# Altium PCB Multimeter_Schematic.PcbDoc
Units mm, origin at the board's own origin, x right, y up, seen from the top; angles counter-clockwise.
Board outline 120 x 80 mm, 2 copper layers (Top Layer, Bottom Layer); 89 components, 62 nets, 306 pads, 51 vias.
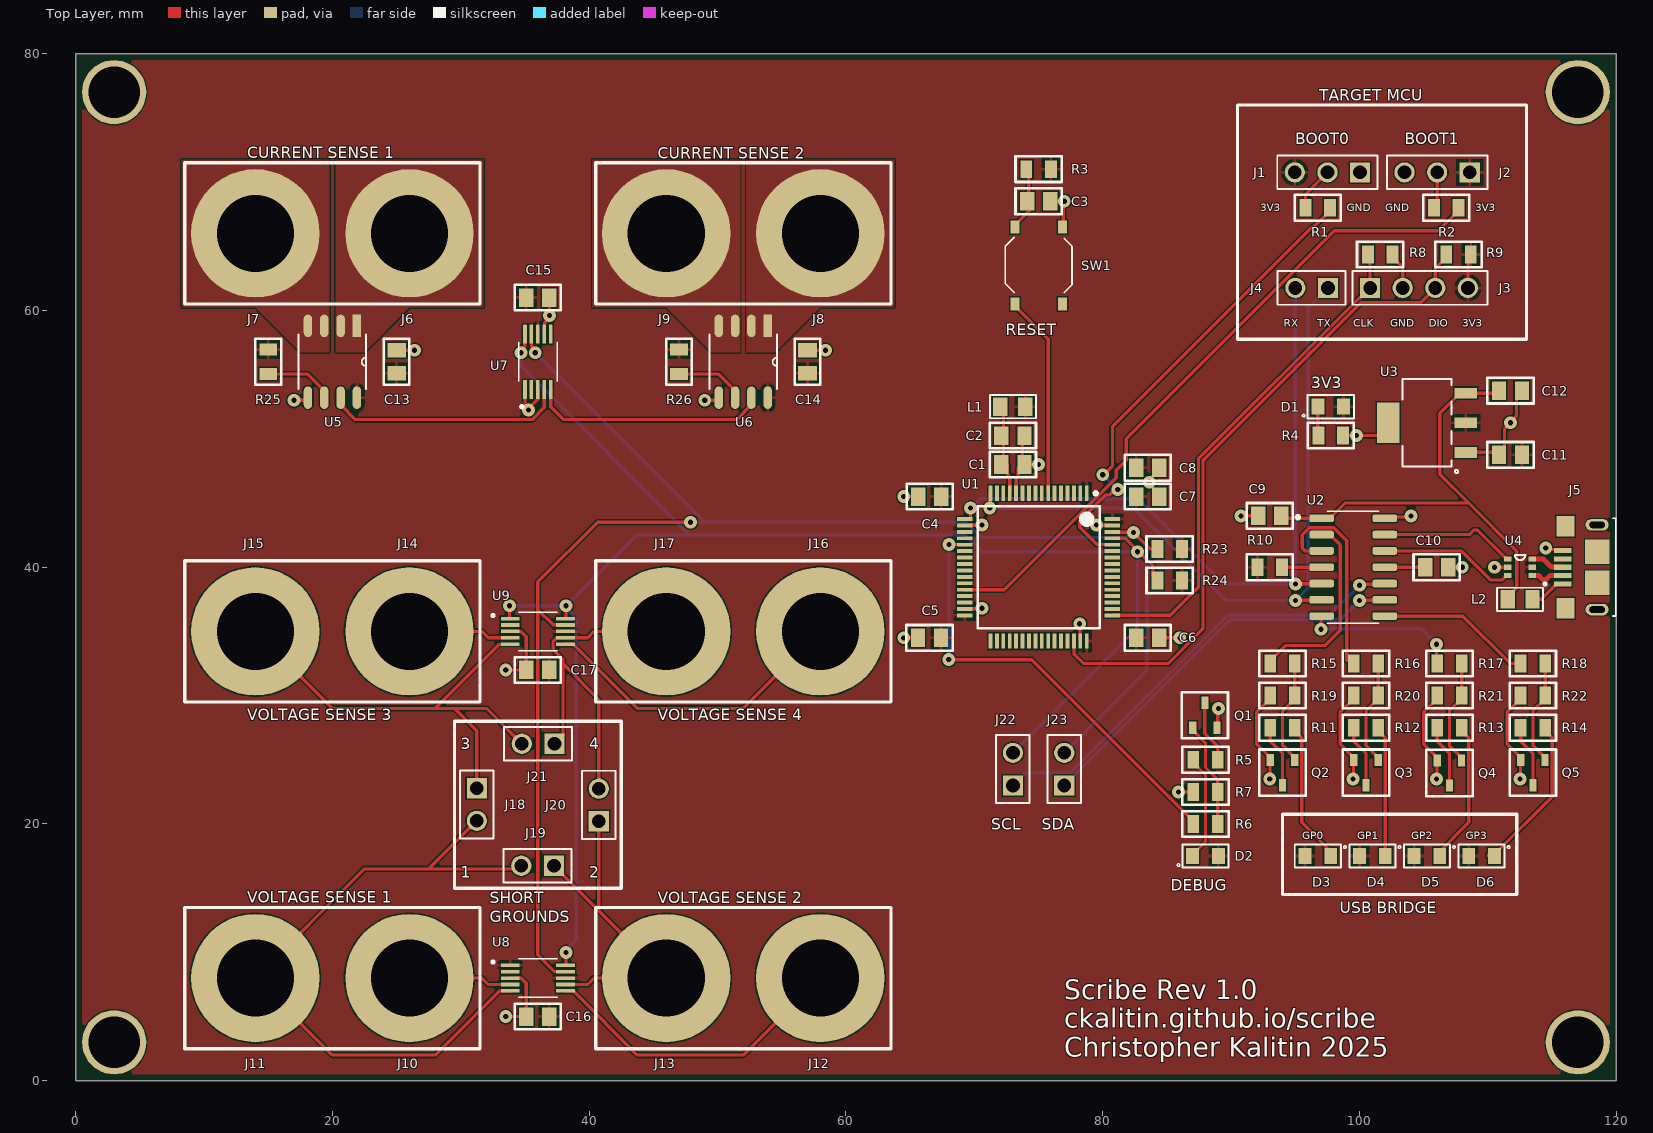
[diagram p0: Top Layer view]
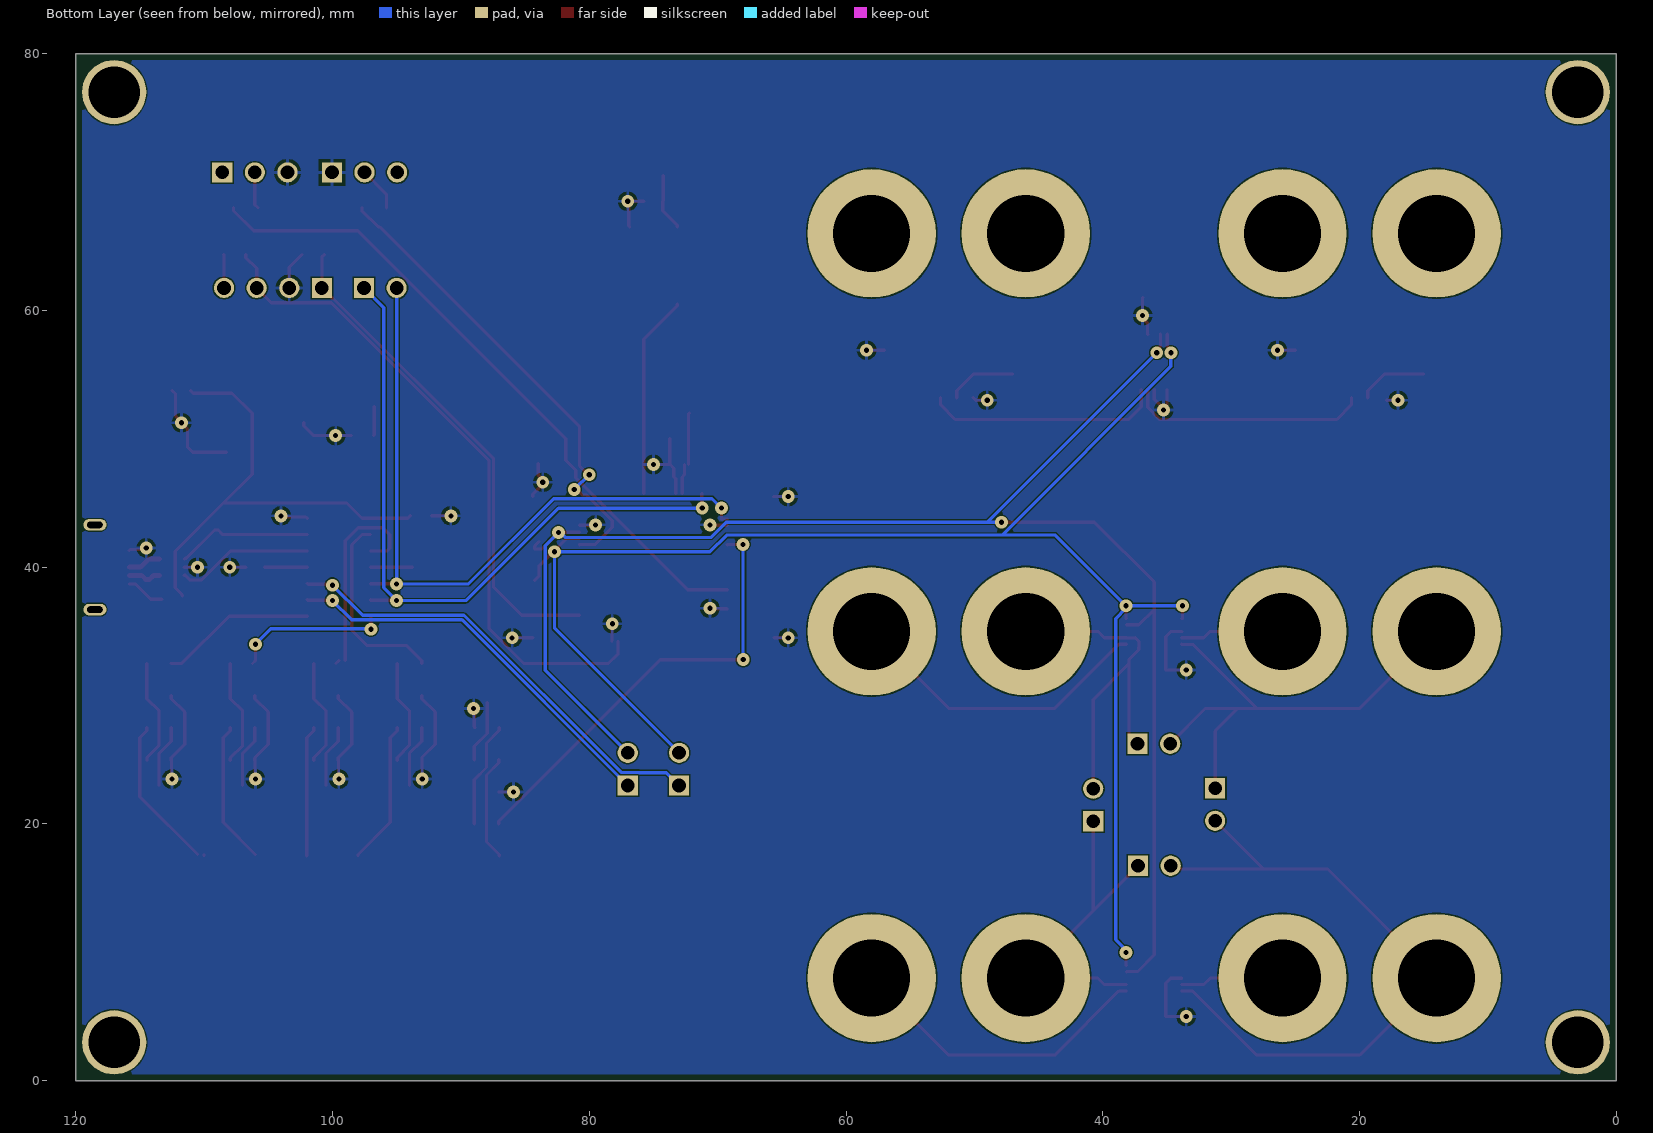
[diagram p1: Bottom Layer view, seen from below]

## Layer stack, top to bottom
Top Solder: solder mask 0.0102, Solder Resist, Dk 3.5
Top Layer: signal copper 0.0356
Dielectric 1: dielectric 0.32, FR-4, Dk 4.8
Bottom Layer: signal copper 0.0356
Bottom Solder: solder mask 0.0102, Solder Resist, Dk 3.5

## Board outline
0,0 120,0 120,80 0,80

## Design rules (kind name [scope] priority, off if disabled: settings)
Clearance [All] p1: gap=0.1 ignorepadtopadclearanceinfootprint=FALSE
DiffPairsRouting [All] p1: maxlimit=0.254 minlimit=0.254 mostfreqgap=0.254 toplayer_minwidth=0.381 toplayer_maxwidth=0.381 toplayer_prefwidth=0.381 bottomlayer_minwidth=0.381 bottomlayer_maxwidth=0.381 bottomlayer_prefwidth=0.381 maxuncoupledlength=12.7
HoleSize [All] p1: absolutevalues=TRUE maxlimit=10 minlimit=0.025 maxpercent=80.000 minpercent=20.000
HoleToHoleClearance [All] p1: gap=0.1 allowstackedmicrovias=TRUE
MinimumSolderMaskSliver [All] p1: minsoldermaskwidth=0.01
PolygonConnect [All] p1: connectstyle=Relief reliefconductorwidth=0.254 reliefentries=4 polygonreliefangle="90 Angle" airgapwidth=0.254
RoutingVias [All] p1: holewidth=0.711 width=1.27 viastyle="Through Hole" minholewidth=0.711 minwidth=1.27 maxholewidth=0.711 maxwidth=1.27
SilkToSilkClearance [All] p1: silktosilkclearance=0.1
SilkToSolderMaskClearance [IsPad] p1: minsilkscreentomaskgap=0.1 clearancetoexposedcopper=TRUE
SolderMaskExpansion [All] p1: expansion=0.102 istentingtop=FALSE
SupplyNets "Schematic Supply Nets_37" [InNet('I2C_SDA_OUT')] p1: voltage=0.000
SupplyNets "Schematic Supply Nets_36" [InNet('I2C_SCL_OUT')] p2: voltage=0.000
SupplyNets "Schematic Supply Nets_35" [InNet('VOLT_SENSE_2_NEG')] p3: voltage=0.000
SupplyNets "Schematic Supply Nets_34" [InNet('CURR_SENSE_2')] p4: voltage=0.000
SupplyNets "Schematic Supply Nets_33" [InNet('VOLT_SENSE_2_POS')] p5: voltage=0.000
SupplyNets "Schematic Supply Nets_32" [InNet('VOLT_SENSE_3_NEG')] p6: voltage=0.000
SupplyNets "Schematic Supply Nets_31" [InNet('CURR_SENSE_2_NEG')] p7: voltage=0.000
SupplyNets "Schematic Supply Nets_30" [InNet('VOLT_SENSE_1_POS')] p8: voltage=0.000
SupplyNets "Schematic Supply Nets_29" [InNet('CURR_SENSE_2_POS')] p9: voltage=0.000
SupplyNets "Schematic Supply Nets_28" [InNet('VOLT_SENSE_1_NEG')] p10: voltage=0.000
SupplyNets "Schematic Supply Nets_27" [InNet('CURR_SENSE_1_NEG')] p11: voltage=0.000
SupplyNets "Schematic Supply Nets_26" [InNet('VOLT_SENSE_3_POS')] p12: voltage=0.000
SupplyNets "Schematic Supply Nets_25" [InNet('VOLT_SENSE_4_POS')] p13: voltage=0.000
SupplyNets "Schematic Supply Nets_24" [InNet('CURR_SENSE_1')] p14: voltage=0.000
SupplyNets "Schematic Supply Nets_23" [InNet('VOLT_SENSE_4_NEG')] p15: voltage=0.000
SupplyNets "Schematic Supply Nets_22" [InNet('CURR_SENSE_1_POS')] p16: voltage=0.000
SupplyNets "Schematic Supply Nets_21" [InNet('USB_D-')] p17: voltage=0.000
SupplyNets "Schematic Supply Nets_12" [InNet('USB_D+')] p18: voltage=0.000
SupplyNets "Schematic Supply Nets_15" [InNet('VBUS')] p19: voltage=0.000
SupplyNets "Schematic Supply Nets_20" [InNet('I2C_SDA')] p20: voltage=0.000
SupplyNets "Schematic Supply Nets_19" [InNet('GP1_LED')] p21: voltage=0.000
SupplyNets "Schematic Supply Nets_18" [InNet('GP3_LED')] p22: voltage=0.000
SupplyNets "Schematic Supply Nets_17" [InNet('GP2_LED')] p23: voltage=0.000
SupplyNets "Schematic Supply Nets_13" [InNet('GP0_LED')] p24: voltage=0.000
SupplyNets "Schematic Supply Nets_11" [InNet('I2C_SCL')] p25: voltage=0.000
SupplyNets "Schematic Supply Nets_16" [InNet('USB_D_P')] p26: voltage=0.000
SupplyNets "Schematic Supply Nets_14" [InNet('USB_D_N')] p27: voltage=0.000
SupplyNets "Schematic Supply Nets_10" [InNet('LED1')] p28: voltage=0.000
SupplyNets "Schematic Supply Nets_9" [InNet('NRST')] p29: voltage=0.000
SupplyNets "Schematic Supply Nets_8" [InNet('UART_RX')] p30: voltage=0.000
SupplyNets "Schematic Supply Nets_7" [InNet('UART_TX')] p31: voltage=0.000
SupplyNets "Schematic Supply Nets_6" [InNet('SWDIO')] p32: voltage=0.000
SupplyNets "Schematic Supply Nets_5" [InNet('SWCLK')] p33: voltage=0.000
SupplyNets "Schematic Supply Nets_4" [InNet('BOOT1')] p34: voltage=0.000
SupplyNets "Schematic Supply Nets_3" [InNet('BOOT0')] p35: voltage=0.000
SupplyNets "Schematic Supply Nets_2" [InNet('VDDA')] p36: voltage=0.000
SupplyNets "Schematic Supply Nets_1" [InNet('GND')] p37: voltage=0.000
SupplyNets "Schematic Supply Nets" [InNet('3V3')] p38: voltage=0.000
Width [All] p1: maxlimit=0.254 minlimit=0.254 preferedwidth=0.254
24 further rules are at their usual default settings.

## Classes and differential pairs
differential pair USB_D: +USB_D_P -USB_D_N

## Components (designator, comment, footprint, x,y, rotation, side; value= is the part's Value field where it differs from the comment)
C1 "10nF" CAP_CC0805_YAG 73,48 r180 top
C2 "1uF" CAP_CC0805_YAG 73,50.25 r180 top
C3 "100nF" CAP_CC0805_YAG 75,68.5 r180 top
C4 "100nF" CAP_CC0805_YAG 66.526,45.5 r0 top
C5 "100nF" CAP_CC0805_YAG 66.5,34.5 r180 top
C6 "100nF" CAP_CC0805_YAG 83.5,34.5 r0 top
C7 "100nF" CAP_CC0805_YAG 83.5,45.5 r0 top
C8 "4.7uF" CAP_CC0805_YAG 83.5,47.75 r180 top
C9 "10uF" CAP_CC0805_YAG 93,44 r180 top
C10 "10uF" CAP_CC0805_YAG 106,40 r0 top
C11 "22uF" CAP_CC0805_YAG 111.75,48.75 r0 top
C12 "10uF" CAP_CC0805_YAG 111.75,53.75 r180 top
C13 "100nF" CAP_CC0805_YAG 25,56 r270 top
C14 "100nF" CAP_CC0805_YAG 57,56 r270 top
C15 "100nF" CAP_CC0805_YAG 36,61 r180 top
C16 "100nF" CAP_CC0805_YAG 36,5 r0 top
C17 "100nF" CAP_CC0805_YAG 36,32 r0 top
D1 "GREEN" LTST-C170TGKT 97.75,52.5 r180 top
D2 "GREEN" LTST-C170TGKT 88,17.5 r180 top
D3 "GREEN" LTST-C170TGKT 96.75,17.5 r0 top
D4 "GREEN" LTST-C170TGKT 101,17.5 r0 top
D5 "GREEN" LTST-C170TGKT 105.25,17.5 r0 top
D6 "GREEN" LTST-C170TGKT 109.5,17.5 r0 top
J1 "0022032031" CONN3X1_22032031_MOL 100.04,70.75 r180 top
J2 "0022032031" CONN3X1_22032031_MOL 108.58,70.75 r180 top
J3 "0022032041" CONN3X1_22032041_MOL 100.82,61.75 r0 top
J4 "0022032021" CONN3X1_22032021_MOL 97.54,61.75 r180 top
J5 "10118193-0001LF" AMPHENOL_10118193-0001LF 118.5,40 r90 top
J6 "CT2232-2" CT2232-2 26,66 r270 top
J7 "CT2232-0" CT2232-0 14,66 r270 top
J8 "CT2232-2" CT2232-2 58,66 r270 top
J9 "CT2232-0" CT2232-0 46,66 r270 top
J10 "CT2232-2" CT2232-2 26,8 r270 top
J11 "CT2232-0" CT2232-0 14,8 r270 top
J12 "CT2232-2" CT2232-2 58,8 r270 top
J13 "CT2232-0" CT2232-0 46,8 r270 top
J14 "CT2232-2" CT2232-2 26,35 r270 top
J15 "CT2232-0" CT2232-0 14,35 r270 top
J16 "CT2232-2" CT2232-2 58,35 r270 top
J17 "CT2232-0" CT2232-0 46,35 r270 top
J18 "0022032021" CONN3X1_22032021_MOL 31.25,22.79 r270 top
J19 "0022032021" CONN3X1_22032021_MOL 37.25,16.75 r180 top
J20 "0022032021" CONN3X1_22032021_MOL 40.75,20.21 r90 top
J21 "0022032021" CONN3X1_22032021_MOL 37.29,26.25 r180 top
J22 "0022032021" CONN3X1_22032021_MOL 73,23 r90 top
J23 "0022032021" CONN3X1_22032021_MOL 77,23 r90 top
L1 "470" IND_HZ0805G471R-10 73,52.5 r0 top
L2 "600" IND_HZ0805G471R-10 112.5,37.5 r180 top
Q1 "T2N7002AK,LM" T2N7002AK,LM 87.95,28.475 r0 top
Q2 "T2N7002AK,LM" T2N7002AK,LM 94,24 r180 top
Q3 "T2N7002AK,LM" T2N7002AK,LM 100.5,24 r180 top
Q4 "T2N7002AK,LM" T2N7002AK,LM 107,23.975 r180 top
Q5 "T2N7002AK,LM" T2N7002AK,LM 113.5,24 r180 top
R1 "10k" RESC2012X60N 96.75,68 r180 top
R2 "10k" RESC2012X60N 106.75,68 r180 top
R3 "10k" RESC2012X60N 75,71 r0 top
R4 "100" RESC2012X60N 97.75,50.25 r180 top
R5 "100" RESC2012X60N 88,25 r180 top
R6 "10k" RESC2012X60N 88,20 r180 top
R7 "10k" RESC2012X60N 88,22.5 r0 top
R8 "100k" RESC2012X60N 101.6,64.35 r0 top
R9 "100k" RESC2012X60N 107.7,64.35 r180 top
R10 "10k" RESC2012X60N 93,40 r0 top
R11 "100" RESC2012X60N 94,27.5 r0 top
R12 "100" RESC2012X60N 100.5,27.5 r0 top
R13 "100" RESC2012X60N 107,27.5 r0 top
R14 "100" RESC2012X60N 113.5,27.5 r0 top
R15 "10k" RESC2012X60N 94,32.5 r180 top
R16 "10k" RESC2012X60N 100.5,32.5 r180 top
R17 "10k" RESC2012X60N 107,32.5 r180 top
R18 "10k" RESC2012X60N 113.5,32.5 r180 top
R19 "10k" RESC2012X60N 94,30 r0 top
R20 "10k" RESC2012X60N 100.5,30 r0 top
R21 "10k" RESC2012X60N 107,30 r0 top
R22 "10k" RESC2012X60N 113.5,30 r0 top
R23 "10k" RESC2012X60N 85.206,41.425 r0 top
R24 "10k" RESC2012X60N 85.206,38.971 r180 top
R25 "1k" RESC2012X60N 15,56 r270 top
R26 "1k" RESC2012X60N 47,56 r270 top
SW1 "SPST" SW4-SMD-5.2X5.2X1.5MM 75,63.5 r90 top
U1 "STM32F103RBT6TR" STM-LQFP64_V 75,40 r270 top
U2 "MCP2221A-I/SL" SOIC127P600X175-14N 99.5,40 r0 top
U3 "AZ1117CH-3.3TRG1" SOT-223_DIO 105.25,51.25 r90 top
U4 "NUF2221W1T2G" SOT-363 112.5,40 r0 top
U5 "ACS711ELCTR-25AB-T" SOICN-8_ALM 20,56 r270 top
U6 "ACS711ELCTR-25AB-T" SOICN-8_ALM 52,56 r270 top
U7 "ADS1115IDGSR" SOP50P490X110-10N 36,56 r90 top
U8 "ADS1115IDGSR" SOP50P490X110-10N 36,8 r0 top
U9 "ADS1115IDGSR" SOP50P490X110-10N 36,35 r0 top

## Footprints (in the part's own frame and the unit in brackets; to place one, negate y for a bottom-side part, rotate by r counter-clockwise, add the part's x,y. Pads: shape width x height; smd on the part's side, far side on the other; paste and mask are expansions set on the pad)
AMPHENOL_10118193-0001LF [mm]
  rect 0.4x1.35 smd: 1(-1.3,2.675) 2(-0.65,2.675) 3(0,2.675) 4(0.65,2.675) 5(1.3,2.675)
  rect 1.6x1.4 smd: S1(-3.2,2.45) S2(3.2,2.45)
  rect 1.9x1.9 smd: S3(1.2,0) S4(-1.2,0)
  oval 0.9x1.8 hole 0.5 slot 1.2 at 90 deg: S5(-3.3,0) S6(3.3,0)
  silkscreen extent -3.8,-1.45 3.8,4.15, body extent -3.93,-2.7 3.93,2.96, height 2.87
CAP_CC0805_YAG [mil]
  rect 44x57 smd paste+0 mask+0: 1(-35.31,0) 2(35.31,0)
  silkscreen extent -71,-39 71,39, body extent -43,-29 43,29, height 57
CONN3X1_22032021_MOL [mil]
  rect 62x62 / inner round 60 / far side rect 62x62 hole 42 paste-99999 mask+0: 1(0,0)
  round 62 / inner round 60 / far side round 62 hole 42 paste-99999 mask+0: 2(100,0)
  silkscreen extent -54,-52 155,52, body extent -50,-49 150,51, height 374
CONN3X1_22032031_MOL [mil]
  rect 62x62 / inner round 60 / far side rect 62x62 hole 42 paste-99999 mask+0: 1(0,0)
  round 62 / inner round 60 / far side round 62 hole 42 paste-99999 mask+0: 2(100,0) 3(200,0)
  silkscreen extent -54,-52 254,52, body extent -50,-49 250,51, height 374
CONN3X1_22032041_MOL [mil]
  rect 62x62 / inner round 60 / far side rect 62x62 hole 42 paste-99999 mask+0: 1(0,0)
  round 62 / inner round 60 / far side round 62 hole 42 paste-99999 mask+0: 2(100,0) 3(200,0) 4(300,0)
  silkscreen extent -54,-52 360,52, body extent -50,-49 350,51, height 374
CT2232-0 [mm]
  round 10 hole 6: 1(0,0)
  body extent -11.4,-5.5 5.64,5.49, height 12.5
CT2232-2 [mm]
  round 10 hole 6: 1(0,0)
  body extent -11.4,-5.5 5.64,5.49, height 13.5
IND_HZ0805G471R-10 [mm]
  rect 1.118x1.448 smd: 1(-0.973,0) 2(0.973,0)
  silkscreen extent -1.8,-0.9 1.8,0.9, body extent -1,-0.63 1,0.63, height 1.05
LTST-C170TGKT [mm]
  rect 1x1.25 smd: 1(-1,0) 2(1,0)
  silkscreen extent -1.8,-0.9 2.2,0.9, body extent -1,-0.63 1,0.63, height 0.8
RESC2012X60N [mm]
  rect 0.92x1.38 smd: 1(-0.955,0) 2(0.955,0)
  silkscreen extent -1.8,-1 1.8,1, body extent -1,-0.63 1,0.63, height 0.6
SOIC127P600X175-14N [mm]
  rrect50% 1.91x0.6 smd: 1(-2.46,3.81) 2(-2.46,2.54) 3(-2.46,1.27) 4(-2.46,0) 5(-2.46,-1.27) 6(-2.46,-2.54) 7(-2.46,-3.81) 8(2.46,-3.81) 9(2.46,-2.54) 10(2.46,-1.27) 11(2.46,0) 12(2.46,1.27) 13(2.46,2.54) 14(2.46,3.81)
  silkscreen extent -4.4,-4.37 2,4.37, body extent -3,-4.33 3,4.33, height 1.75
SOICN-8_ALM [mil]
  rect 69x26 smd paste+0 mask+0: 1(-110,75)
  oval 69x26 smd paste+0 mask+0: 2(-110,25) 3(-110,-25) 4(-110,-75) 5(110,-75) 6(110,-25) 7(110,25) 8(110,75)
  silkscreen extent -84,-104 84,104, body extent -131,-99 131,99, height 69
SOP50P490X110-10N [mm]
  rrect25% 1.47x0.28 smd: 1(-2.15,1) 2(-2.15,0.5) 3(-2.15,0) 4(-2.15,-0.5) 5(-2.15,-1) 6(2.15,-1) 7(2.15,-0.5) 8(2.15,0) 9(2.15,0.5) 10(2.15,1)
  silkscreen extent -3.6,-1.5 1.5,1.5, body extent -2.45,-1.5 2.45,1.5, height 1.1
SOT-223_DIO [mm]
  rect 0.851x1.761 smd paste+0 mask+0: 1(-2.3,-3.025) 2(0,-3.025) 3(2.3,-3.025)
  rect 3.151x1.761 smd paste+0 mask+0: 4(0,3.025)
  silkscreen extent -3.93,-2.43 3.4,1.9, body extent -3.27,-3.55 3.27,3.55, height 1.65
SOT-363 [mm]
  rect 0.6x0.4 smd: 1(-0.953,0.635) 2(-0.953,0) 3(-0.953,-0.635) 4(0.953,-0.635) 5(0.953,0) 6(0.953,0.635)
  silkscreen extent -0.4,0.55 0.4,0.95, body extent -1.05,-1 1.05,1, height 1.1
STM-LQFP64_V [mm] "Thin QFP, 64-Leads, Body 10x10mm, Pitch 0.5mm, ST Recommended"
  rect 1.2x0.3 smd: 1(-5.75,3.75) 2(-5.75,3.25) 3(-5.75,2.75) 4(-5.75,2.25) 5(-5.75,1.75) 6(-5.75,1.25) 7(-5.75,0.75) 8(-5.75,0.25) 9(-5.75,-0.25) 10(-5.75,-0.75) 11(-5.75,-1.25) 12(-5.75,-1.75) 13(-5.75,-2.25) 14(-5.75,-2.75) 15(-5.75,-3.25) 16(-5.75,-3.75) 33(5.75,-3.75) 34(5.75,-3.25) 35(5.75,-2.75) 36(5.75,-2.25) 37(5.75,-1.75) 38(5.75,-1.25) 39(5.75,-0.75) 40(5.75,-0.25) 41(5.75,0.25) 42(5.75,0.75) 43(5.75,1.25) 44(5.75,1.75) 45(5.75,2.25) 46(5.75,2.75) 47(5.75,3.25) 48(5.75,3.75)
  rect 0.3x1.2 smd: 17(-3.75,-5.75) 18(-3.25,-5.75) 19(-2.75,-5.75) 20(-2.25,-5.75) 21(-1.75,-5.75) 22(-1.25,-5.75) 23(-0.75,-5.75) 24(-0.25,-5.75) 25(0.25,-5.75) 26(0.75,-5.75) 27(1.25,-5.75) 28(1.75,-5.75) 29(2.25,-5.75) 30(2.75,-5.75) 31(3.25,-5.75) 32(3.75,-5.75) 49(3.75,5.75) 50(3.25,5.75) 51(2.75,5.75) 52(2.25,5.75) 53(1.75,5.75) 54(1.25,5.75) 55(0.75,5.75) 56(0.25,5.75) 57(-0.25,5.75) 58(-0.75,5.75) 59(-1.25,5.75) 60(-1.75,5.75) 61(-2.25,5.75) 62(-2.75,5.75) 63(-3.25,5.75) 64(-3.75,5.75)
  silkscreen extent -5.87,-4.75 4.75,4.75, body extent -6,-6 6,6, height 1.6
SW4-SMD-5.2X5.2X1.5MM [mm]
  rect 1x0.7 smd: 1(-3,1.85) 2(3,1.85) 3(-3,-1.85) 4(3,-1.85)
  silkscreen extent -2.1,-2.6 2.2,2.6, body extent -3.2,-2.6 3.2,2.6, height 1.5
T2N7002AK,LM [mm]
  rect 0.56x0.95 smd: 1(-0.95,-0.975) 2(0.95,-0.975) 3(0,0.975)
  silkscreen extent -1.8,-1.8 1.8,1.8, body extent -1.45,-1.2 1.45,1.2, height 0.95

## Part data
C1: library part CC0805KRX7R8BB103, "10000 pF ±10% 25V Ceramic Capacitor X7R 0805 (2012 Metric)", Manufacturer=YAGEO, Supplier Part Number=311-3579-2-ND, Manufacturer Part Number=CC0805KRX7R8BB103, Supplier=Digikey
C2: library part CC0805KKX7R8BB105, "1 µF ±10% 25V Ceramic Capacitor X7R 0805 (2012 Metric)", Manufacturer=YAGEO, Supplier Part Number=311-1456-2-ND, Manufacturer Part Number=CC0805KKX7R8BB105, Supplier=Digikey
C3 C4 C5 C6 C7 C13 C14 C15 C16 C17: library part CC0805KRX7R8BB104, "0.1 µF ±10% 25V Ceramic Capacitor X7R 0805 (2012 Metric)", Manufacturer=YAGEO, Supplier Part Number=311-1141-2-ND, Manufacturer Part Number=CC0805KRX7R8BB104, Supplier=Digikey
C8: library part CC0805KKX7R8BB475, "4.7 µF ±10% 25V Ceramic Capacitor X7R 0805 (2012 Metric)", Manufacturer=YAGEO, Supplier Part Number=311-1885-2-ND, Manufacturer Part Number=CC0805KKX7R8BB475, Supplier=Digikey
C9 C10 C12: library part CC0805KKX5R8BB106, "10 µF ±10% 25V Ceramic Capacitor X5R 0805 (2012 Metric)", Manufacturer=YAGEO, Supplier Part Number=311-1869-2-ND, Manufacturer Part Number=CC0805KKX5R8BB106, Supplier=Digikey
C11: library part CC0805MKX5R8BB226, "22 µF ±20% 25V Ceramic Capacitor X5R 0805 (2012 Metric)", Manufacturer=YAGEO, Supplier Part Number=311-1903-2-ND, Manufacturer Part Number=CC0805MKX5R8BB226, Supplier=Digikey
D1 D2 D3 D4 D5 D6: library part LTST-C170TGKT, "Green 525nm LED Indication - Discrete 3.2V 0805 (2012 Metric)", Manufacturer="Lite-On Inc.", Supplier Part Number=160-1887-2-ND, ComponentLink1Description=Digikey, ComponentLink1URL=https://www.digikey.ca/en/products/detail/liteon/LTST-C190KFKT/386813, Manufacturer Part Number=LTST-C170TGKT, Supplier=Digikey
J1 J2: "Connector Header Through Hole 3 position 0.100\" (2.54mm)", Manufacturer=Molex, Supplier Part Number=900-0022032031-ND, Manufacturer Part Number=0022032031, Supplier=Digikey
J3: "Connector Header Through Hole 4 position 0.100\" (2.54mm)", Manufacturer=Molex, Supplier Part Number=WM4002-ND, Manufacturer Part Number=0022032041, Supplier=Digikey
J4 J18 J19 J20 J21 J22 J23: "Connector Header Through Hole 2 position 0.100\" (2.54mm)", Manufacturer=Molex, Supplier Part Number=WM4000-ND, Manufacturer Part Number=0022032021, Supplier=Digikey
J5: "USB - micro B USB 2.0 Receptacle Connector 5 Position Surface Mount, Right Angle; Through Hole", Manufacturer="Amphenol ICC (FCI)", Package=None, Supplier Part Number=609-4616-2-ND, Check_prices=https://www.snapeda.com/parts/10118193-0001LF/Amphenol+FCI/view-part/?ref=eda, Manufacturer Part Number=10118193-0001LF, MF="Amphenol ICC", MP=10118193-0001LF, SnapEDA_Link=https://www.snapeda.com/parts/10118193-0001LF/Amphenol+FCI/view-part/?ref=snap, Supplier=Digikey
J6 J8 J10 J12 J14 J16: "(Banana) CONN BIND POST KNURLED RED", Manufacturer="Cal Test Electronics", Supplier Part Number=BKCT2232-0-ND, Parameter 4=CT2232-0, Supplier=Digikey
J7 J9 J11 J13 J15 J17: "(Banana) CONN BIND POST KNURLED BLACK", Manufacturer="Cal Test Electronics", Supplier Part Number=BKCT2232-0-ND, Parameter 4=CT2232-0, Supplier=Digikey
L1: library part HZ0805G471R-10, "470 Ohms @ 100 MHz 1 Power, Signal Line Ferrite Bead 0805 (2012 Metric) 1A 200mOhm", Manufacturer="Laird-Signal Integrity Products", Supplier Part Number=240-2400-2-ND, Manufacturer Part Number=HZ0805G471R-10, Supplier=Digikey
L2: library part MI0603J601R-10, "600 Ohms @ 100 MHz 1 Power, Signal Line Ferrite Bead 0603 (1608 Metric) 1A 200mOhm", Manufacturer="Laird-Signal Integrity Products", Supplier Part Number=240-2371-2-ND, Manufacturer Part Number=MI0603J601R-10, Supplier=Digikey
Q1 Q2 Q3 Q4 Q5: "N-Channel 60 V 200mA (Ta) 320mW (Ta) Surface Mount SOT-23-3", Manufacturer="Toshiba Semiconductor and Storage", Supplier Part Number=T2N7002AKLMCT-ND, ComponentLink1Description=Digikey, ComponentLink1URL=https://www.digikey.ca/en/products/detail/toshiba-semiconductor-and-storage/T2N7002AK-LM/5298028, Manufacturer Part Number=T2N7002AK,LM, Supplier=Digikey
R1 R2 R3 R6 R7 R10 R15 R16 R17 R18 R19 R20 R21 R22 R23 R24: library part RC0805FR-0710KL, "10 kOhms ±1% 0.125W, 1/8W Chip Resistor 0805 (2012 Metric) Moisture Resistant Thick Film", Manufacturer=YAGEO, Supplier Part Number=311-10.0KCRTR-ND, Manufacturer Part Number=RC0805FR-0710KL, Supplier=Digikey
R4 R5 R11 R12 R13 R14: library part RC0805FR-07100RL, "100 Ohms ±1% 0.125W, 1/8W Chip Resistor 0805 (2012 Metric) Moisture Resistant Thick Film", Manufacturer=YAGEO, Supplier Part Number=311-100CRTR-ND, Manufacturer Part Number=RC0805FR-07100RL, Supplier=Digikey
R8 R9: library part RC0805FR-07100KL, "100 kOhms ±1% 0.125W, 1/8W Chip Resistor 0805 (2012 Metric) Moisture Resistant Thick Film", Manufacturer=YAGEO, Supplier Part Number=311-100KCRTR-ND, Manufacturer Part Number=RC0805FR-07100KL, Supplier=Digikey
R25 R26: library part RC0805FR-071KL, "1 kOhms ±1% 0.125W, 1/8W Chip Resistor 0805 (2012 Metric) Moisture Resistant Thick Film", Manufacturer=YAGEO, Supplier Part Number=311-1.00KCRTR-ND, Manufacturer Part Number=RC0805FR-071KL, Supplier=Digikey
SW1: "Tactile Switch SPST-NO Top Actuated Surface Mount", Manufacturer="Alps Alpine", Manufacturer Part Numbe=SKQGADE010, Supplier Part Numbr=4809-SKQGADE010TR-ND, Supplier=Digikey
U1: library part CMP-0237-00169-4, "ARM Cortex-M3 32-bit MCU, 128 KB Flash, 20 KB Internal RAM, 51 I/Os, 64-pin LQFP, -40 to 85 degC, Tape and Reel", I/Os (High Current)=51, Operating Frequency(F) (Processor speed) (MHz)=72, Supply Voltage(Vcc) min (V)=2, A/D Converter="2x12-bit (16 Channel)", ComponentLink1Description="Manufacturer URL", ComponentLink1URL=http://www.st.com/web/en/home.html, ComponentLink2Description=Datasheet, ComponentLink2URL=http://www.st.com/st-web-ui/static/active/en/resource/technical/document/datasheet/CD00161566.pdf, ComponentLink3Description="Package Specification", ComponentLink3URL=http://www.st.com/st-web-ui/static/active/en/resource/technical/document/datasheet/DM00037051.pdf, Core="ARM Cortex-M3", DatasheetVersion="Rev. 16", FLASH Size (Prog) (kB)=128, Internal RAM Size (kB)=20, Mounting Technology="Surface Mount", PackageDescription="64-Pin Low Profile Quad Flat Package, 10 x 10 mm Body, 0.5 mm Pitch", PackageReference=LQFP64, PackageVersion="Rev. 4, 06/2013", Packing="Tape and Reel", PartNumber=STM32F103RBT6TR
U2: "USB Bridge, USB to I2C/UART USB 2.0 I2C, UART Interface 14-SOIC", Manufacturer="Microchip Technology", Supplier Part Number=MCP2221A-I/SL-ND, Manufacturer Part Number=MCP2221A-I/SL, Supplier=Digikey
U3: "Linear Voltage Regulator IC Positive Fixed 1 Output 1A SOT-223-3", Manufacturer="Diodes Incorporated", Supplier Part Number=AZ1117CH-3.3TRG1DITR-ND, Manufacturer Part Number=AZ1117CH-3.3TRG1, Supplier=Digikey
U4: "RC (Pi) EMI Filter 2nd Order Low Pass 3 Channel R = 22Ohms, C = 42pF (Total) 6-TSSOP, SC-88, SOT-363", Manufacturer=onsemi, Supplier Part Number=NUF2221W1T2GOSTR-ND, Manufacturer Part Number=NUF2221W1T2G, Supplier=Digikey
U5 U6: "Current Sensor 25A 1 Channel Hall Effect, Open Loop Bidirectional 8-SOIC (0.154\", 3.90mm Width)", Manufacturer="*Allegro MicroSystems", Supplier Part Numebr=620-1371-2-ND, Manufacturer Part Number=ACS711ELCTR-25AB-T, Supplier=Digikey
U7 U8 U9: "16 Bit Analog to Digital Converter 2, 4 Input 1 Sigma-Delta 10-VSSOP", Manufacturer="Texas Instruments", Supplier Part Number=296-38849-2-ND, Manufacturer Part Number=ADS1115IDGSR, Supplier=Digikey

## Free pads (board coordinates)
  round 5 hole 4: 0(3,3) 0(3,77) 0(117,3) 0(117,77)

## Via types
v1: diameter 1, hole 0.4, Top Layer to Bottom Layer, tented both sides, 51 vias

## Nets (pads, with @x,y where several pads share a name; then routed paths per layer and width w, separated by ;. In a path a pad name is that pad's centre, name@x,y a point inside that pad or via, vN(x,y) a via of type N, cw(c..) or ccw(c..) an arc to the next point about the centre after c; other vN are vias at no path point)
3V3: C4.2 C5.1 C6.1 C7.1 C8.2 C11.2 C13.2 C14.2 C15.2 C16.2 C17.2 D1.1 D2.1 D3.1 D4.1 D5.1 D6.1 J1.3 J2.1 J3.4 L1.2 R3.2 R9.1 R10.1 R23.2 R24.1 R25.1 R26.1 U1.1 U1.19 U1.32 U1.48 U1.64 U3.2 U4.5 U5.8 U6.8 U7.8 U8.1 U8.8 U9.8 | length 2.6
  Top Layer w0.254: J3.4 108.44,64.315 R9.1@108.475,64.35
BOOT0: R1.1 U1.60 | length 37.5
  Top Layer w0.254: v1(80,47.2) 80.074,47.2 80.75,47.876 80.75,50.93 96.324,66.504 96.439,66.504 97.705,67.77 R1.1 ; U1.60 80.727,41.773 79.527,41.773 78.2,43.1 78.2,43.628 80.187,45.615 80.512,45.615 80.961,46.064 v1(81.163,46.064)
  Bottom Layer w0.254: v1(80,47.2) 80.013,47.2 81.15,46.064 v1(81.163,46.064)
BOOT1: R2.1 U1.28 | length 52.2
  Top Layer w0.254: U1.28 72.321,38.25 81.054,46.983 81.054,47.553 81.817,48.317 81.817,50.002 98.015,66.2 106.135,66.2 107.705,67.77 R2.1
CURR_SENSE_1: U5.7 U7.4 | length 18.7
  Top Layer w0.254: U5.7 20.635,52.66 21.795,51.5 35.557,51.5 36.5,52.443 U7.4
CURR_SENSE_1_NEG: J7.1 U5.3 U5.4
CURR_SENSE_1_POS: J6.1 U5.1 U5.2
CURR_SENSE_2: U6.7 U7.5 | length 18.4
  Top Layer w0.254: U7.5 37,52.5 38,51.5 51.475,51.5 52.635,52.66 U6.7
CURR_SENSE_2_NEG: J9.1 U6.3 U6.4
CURR_SENSE_2_POS: J8.1 U6.1 U6.2
GND: C1.1 C2.1 C3.1 C4.1 C5.2 C6.2 C7.2 C8.1 C9.2 C10.2 C11.1 C12.1 C13.1 C14.1 C15.1 C16.1 C17.1 J1.1 J2.3 J3.2 J5.5 Q1.2 Q2.2 Q3.2 Q4.2 Q5.2 R4.1 R7.1 R8.2 R19.1 R20.1 R21.1 R22.1 SW1.4 U1.12 U1.18 U1.31 U1.47 U1.63 U2.14 U3.1 U3.4 U4.2 U5.5 U6.5 U7.1 U7.3 U7.7 U8.3 U9.3 | length 99
  Top Layer w0.254: v1(17,53) U5.5@17.907,53 ; C13.1 25.003,56.9 v1(26.4,56.9) ; v1(33.5,5) C16.1 35.103,7.597 34.713,7.987 33.863,7.987 U8.3 ; v1(33.5,32) C17.1 35.103,34.597 34.713,34.987 33.863,34.987 U9.3 ; U7.1 35,52.702 v1@35.3,52.402 ; v1(35.265,52.235) 35.265,52.367 v1@35.3,52.402 ; U7.3 35.987,53.837 35.987,53.089 v1@35.3,52.402 ; U7.7 36.513,58.163 36.513,59.011 36.9,59.398 v1(36.9,59.6) 36.9,60.997 C15.1 ; v1(49,53) 49.907,53 50.095,53.188 U6.5 ; C14.1@57.003,56.9 v1(58.4,56.9) ; v1(64.5,34.5) C5.2 ; v1(64.5,45.5) C4.1 ; U1.31 69.273,36.773 70.573,36.773 v1(70.6,36.8) ; U1.18 69.273,43.273 70.573,43.273 v1(70.6,43.3) ; U1.12 73.25,46.887 73.419,47.056 73.419,47.721 73.698,48 C1.1@73.724,48 ; C2.1@73.724,50 C1.1@73.724,48 ; v1(75,48) C1.1 C1.1@73.724,48 ; C3.1@75.724,68.5 C3.1 v1(77,68.5) 76.925,68.425 76.925,66.575 SW1.4 ; v1(78.2,35.6) 78.227,35.573 78.227,34.273 U1.47 ; v1(79.5,43.3) 79.527,43.273 80.727,43.273 U1.63 ; C8.1@83.965,48.068 83.965,47.153 83.617,46.805 83.617,46.445 84.397,45.665 C7.2 ; C6.2 v1(86,34.5) ; v1@85.75,22.5 R7.1 ; Q1.2 88.95,27.55 88.95,28.95 v1(89,29) ; v1(90.776,44) C9.2 C9.2@92.276,44 ; v1(93,23.5) 93.025,23.525 93.025,25.195 92,26.22 92,28.725 93.045,29.77 R19.1 ; R4.1@98.525,50.25 R4.1 v1(99.75,50.25) 101.471,50.25 102.225,51.004 U3.4 ; v1(99.5,23.5) 99.525,23.525 99.525,24.95 Q3.2 99.55,25.17 98.5,26.22 98.5,28.725 99.545,29.77 R20.1 ; U2.14 102.055,43.905 103.905,43.905 v1(104,44) ; R8.2@102.375,64.35 102.375,64.344 103.36,63.358 J3.2 ; v1(106,23.5) 106.025,23.525 106.025,24.925 Q4.2 106.05,25.145 105,26.195 105,28.725 106.045,29.77 R21.1 ; C10.2@106.724,40 C10.2 v1(108,40) ; U3.1 110.888,48.95 111.285,49.347 111.285,50.728 111.75,51.193 v1(111.75,51.25) ; v1(110.5,40) U4.2 ; v1@111.75,51.307 112.215,51.772 112.215,53.491 C12.1@112.474,53.75 ; v1(112.5,23.5) 112.525,23.525 112.525,24.95 Q5.2 112.55,25.17 111.5,26.22 111.5,28.725 112.545,29.77 R22.1 ; v1(114.5,41.5) 114.627,41.373 115.752,41.373 J5.5
  other v1: 85.9,22.5 83.617,46.615
GP0_LED: R15.2 U2.2 | length 15.1
  Top Layer w0.254: R15.2 93.045,32.73 94.215,33.9 97.3,33.9 98.5,35.1 98.5,41.735 97.695,42.54 U2.2
GP1_LED: R16.2 U2.3 | length 16.4
  Top Layer w0.254: U2.3 95.73,41.27 95.533,41.467 95.533,42.533 96,43 96.012,43 96.079,43.067 98.001,43.067 99,42.068 99,32.725 ; R16.2@99.5,32.725 R16.2@99.725,32.5
GP2_LED: R17.2 U2.7 | length 12.1
  Top Layer w0.254: v1(97,35.173) 97,36.15 U2.7 ; v1(106,34) 106,32.725 R17.2@106.225,32.5
  Bottom Layer w0.254: v1(97,35.173) 97.027,35.2 104.8,35.2 v1(106,34)
GP3_LED: R18.2 U2.8 | length 12.1
  Top Layer w0.254: U2.8 108.042,36.19 111.725,32.506 112.539,32.506 R18.2
I2C_SCL: J22.2 R24.2 U1.61 U7.10 U8.10 U9.1 U9.10 | length 128.8
  Top Layer w0.254: v1(33.8,37) 33.8,36.013 33.813,36 U9.1 ; v1(34.7,56.7) 34.7,56.902 34.987,57.189 34.987,58.137 U7.10 ; U8.10 38.187,9 38.2,9.013 v1(38.2,10) ; U9.10 38.187,36 38.2,36.013 v1(38.2,37) ; U1.61 81.75,42.25 82.7,41.3 v1(82.7,41.2) 82.8,41.2 83.918,40.082 83.918,39.304 R24.2
  Bottom Layer w0.254: v1(33.8,37) v1(38.2,37) ; v1(34.7,56.7) 34.7,55.643 47.843,42.5 ; v1(38.2,10) 38.2,10.2 39,11 39,36 38.2,36.8 v1(38.2,37) ; J22.2 82.7,35.24 v1(82.7,41.2) 70.6,41.2 69.3,42.5 51.6,42.5 47.843,42.5 ; v1(38.2,37) 43.7,42.5 47.843,42.5
I2C_SCL_OUT: J22.1 U2.10 | length 35.5
  Top Layer w0.254: v1(100,38.6) 100.065,38.665 101.895,38.665 U2.10
  Bottom Layer w0.254: J22.1 74,24 76.104,24 76.119,24.014 77.514,24.014 89.753,36.254 97.654,36.254 v1(100,38.6)
I2C_SDA: J23.2 R23.1 U1.62 U7.9 U8.9 U9.9 | length 128.5
  Top Layer w0.254: U7.9 35.513,58.137 35.513,57.189 35.8,56.902 v1(35.8,56.7) ; U8.9 38.137,8.513 37.287,8.513 36,9.8 36,36.7 ; U9.9 38.137,35.513 37.187,35.513 36,36.7 ; v1(47.9,43.5) 40.649,43.5 36,38.851 36,36.7 ; U1.62 80.773,42.727 v1@82.373,42.727 ; v1@82.416,42.684 83.675,41.425 R23.1 84.251,41.655 R23.1@83.918,41.988
  Bottom Layer w0.254: v1(35.8,56.7) 49,43.5 ; v1(47.9,43.5) 49,43.5 ; J23.2 83.427,31.967 83.427,41.673 v1(82.4,42.7) 82.255,42.7 81.878,42.323 70.5,42.323 69.323,43.5 49,43.5
I2C_SDA_OUT: J23.1 U2.9 | length 30.9
  Top Layer w0.254: v1(100,37.4) 100.03,37.43 101.93,37.43 U2.9
  Bottom Layer w0.254: J23.1 89.9,35.9 98.5,35.9 v1(100,37.4)
LED1: R6.2 U1.21 | length 34.7
  Top Layer w0.254: v1(68,32.8) 74.45,32.8 86.687,20.563 86.712,20.563 87.045,20.23 R6.2 ; v1(68.027,41.773) 69.227,41.773 U1.21
  Bottom Layer w0.254: v1(68,32.8) 68.014,32.814 68.014,41.759 v1(68.027,41.773)
NetC3_2: C3.2 R3.1 SW1.2 | length 4.5
  Top Layer w0.254: SW1.2 73.15,66.65 74.272,67.772 C3.2@74.272,68.5 ; R3.1@74.225,70.5 74.225,68.551 C3.2@74.276,68.5
NetC10_1: C10.1 U2.11 | length 3.3
  Top Layer w0.254: U2.11 C10.1@105.276,40
NetD1_2: D1.2 R4.2 | length 2.3
  Top Layer w0.254: D1.2 96.75,50.295 R4.2
NetD2_2: D2.2 R5.2 | length 8.3
  Top Layer w0.254: D2.2 87,17.625 88,18.625 88,23.815 87.045,24.77 R5.2
NetD3_2: D3.2 R11.2 | length 11.3
  Top Layer w0.254: R11.2 94.955,27.27 95.5,26.725 95.5,20.125 98,17.625 D3.2@98,17.5
NetD4_2: D4.2 R12.2 | length 10.2
  Top Layer w0.254: R12.2 101.455,27.27 102,26.725 D4.2
NetD5_2: D5.2 R13.2 | length 11.1
  Top Layer w0.254: D5.2@106,17.625 108.5,20.125 108.5,26.725 107.955,27.27 R13.2
NetD6_2: D6.2 R14.2 | length 12.1
  Top Layer w0.254: D6.2@110,17.5 D6.2@110,17.625 ; D6.2@110.5,17.625 115,22.125 115,26.725 114.455,27.27 R14.2
NetJ1_2: J1.2 R1.2 | length 3.5
  Top Layer w0.254: R1.2 95.795,69.045 J1.2
NetJ2_2: J2.2 R2.2 | length 2.9
  Top Layer w0.254: R2.2 106.04,68.245 J2.2
NetJ5_1: J5.1 L2.1 | length 3
  Top Layer w0.254: L2.1@113.3,37.5 114.15,37.5 115.35,38.7 J5.1
NetQ1_1: Q1.1 R6.1 R7.2 | length 8.3
  Top Layer w0.254: Q1.1 87,27.305 88,26.305 88,24.4 88.955,23.445 R6.1
NetQ1_3: Q1.3 R5.1 | length 4.9
  Top Layer w0.254: Q1.3 87.95,27.05 88.955,26.045 R5.1
NetQ2_1: Q2.1 R15.1 R19.2 | length 8.3
  Top Layer w0.254: Q2.1 94.95,25.17 94,26.12 94,28.815 94.955,29.77 R19.2 R15.1
NetQ2_3: Q2.3 R11.1 | length 4.9
  Top Layer w0.254: R11.1 93.045,26.455 94,25.5 Q2.3
NetQ3_1: Q3.1 R16.1 R20.2 | length 8.3
  Top Layer w0.254: Q3.1 101.45,25.17 100.5,26.12 100.5,28.815 101.455,29.77 R20.2 R16.1
NetQ3_3: Q3.3 R12.1 | length 4.9
  Top Layer w0.254: R12.1 99.545,26.455 100.5,25.5 Q3.3
NetQ4_1: Q4.1 R17.1 R21.2 | length 8.3
  Top Layer w0.254: Q4.1 107.95,25.145 107,26.095 107,28.815 107.955,29.77 R21.2 R17.1
NetQ4_3: Q4.3 R13.1 | length 4.9
  Top Layer w0.254: R13.1 106.045,26.455 107,25.5 Q4.3
NetQ5_1: Q5.1 R18.1 R22.2 | length 8.3
  Top Layer w0.254: Q5.1 114.45,25.17 113.5,26.12 113.5,28.815 114.455,29.77 R22.2 R18.1
NetQ5_3: Q5.3 R14.1 | length 4.9
  Top Layer w0.254: R14.1 112.545,26.455 113.5,25.5 Q5.3
NetR10_2: R10.2 U2.4 | length 3.3
  Top Layer w0.254: R10.2@93.775,40 U2.4
NetR25_2: R25.2 U5.6 | length 5.4
  Top Layer w0.254: R25.2 18.072,55.045 19.365,53.752 U5.6
NetR26_2: R26.2 U6.6 | length 5.4
  Top Layer w0.254: R26.2 50.072,55.045 51.365,53.752 U6.6
NRST: SW1.1 U1.7 | length 15.8
  Top Layer w0.254: SW1.1 73.15,60.35 75.75,57.75 U1.7
SWCLK: J3.1 R8.1 U1.49 | length 39.2
  Top Layer w0.254: U1.49 85.25,36.25 87.446,38.446 87.446,48.447 99.953,60.954 100.024,60.954 J3.1 100.82,64.175 R8.1
SWDIO: J3.3 R9.2 U1.46 | length 52.2
  Top Layer w0.254: U1.46 77.75,33.25 78.5,32.5 85.1,32.5 87.8,35.2 87.8,48.3 100.1,60.6 104.75,60.6 J3.3 105.9,63.275 106.745,64.12 R9.2
UART_RX: J4.2 U1.17 U2.5 | length 54.7
  Top Layer w0.254: U1.17 69.677,43.75 69.7,43.773 v1(69.7,44.6) ; v1(95,38.7) 95.015,38.715 97.025,38.715 U2.5
  Bottom Layer w0.254: v1(69.7,44.6) 70.437,45.337 82.763,45.337 89.4,38.7 v1(95,38.7) J4.2
UART_TX: J4.1 U1.16 U2.6 | length 55.4
  Top Layer w0.254: v1(71.2,44.6) 71.227,44.627 71.227,45.727 U1.16 ; v1(95,37.4) 95.03,37.43 97.01,37.43 U2.6
  Bottom Layer w0.254: v1(71.2,44.6) 82.4,44.6 89.6,37.4 v1(95,37.4) 96.011,38.411 96.011,60.221 J4.1
USB_D+: U2.13 U4.1 | length 10.7
  Top Layer w0.254: U2.13 108.54,42.54 108.9,42.9 109.182,42.9 111.375,40.708 111.475,40.708 U4.1
USB_D-: U2.12 U4.3 | length 10.7
  Top Layer w0.254: U2.12 107.93,41.27 110.2,39 111.083,39 111.448,39.365 U4.3
USB_D_N: J5.2 U4.4 | length 2.6
  Top Layer w0.381: U4.4 113.462,39.355 113.933,39.355 114.236,39.052 114.552,39.052 114.864,39.365 115.335,39.365 115.34,39.359 115.815,39.359 J5.2
USB_D_P: J5.3 U4.6 | length 2.6
  Top Layer w0.381: U4.6 114.324,40.635 114.95,40.009 115.815,40.009 J5.3
VBUS: C9.1 C12.2 L2.2 U2.1 U3.3 | length 37.6
  Top Layer w0.254: C9.1@93.948,44 94.138,43.81 U2.1 97.695,43.81 98.885,45 108.5,45 ; C12.2@111.026,53.75 110.826,53.55 U3.3 107.82,53.55 106.25,51.98 106.25,47.25 108.5,45 ; L2.2@111.7,37.765 111.7,37.838 112.25,38.388 112.25,41.25 108.5,45
VDDA: C1.2 C2.2 L1.1 U1.13 | length 6.4
  Top Layer w0.254: L1.1@72.2,52 72.276,51.924 72.276,50 C1.2@72.276,48 ; C1.2@72.582,48 72.582,47.196 72.75,47.027 U1.13
VOLT_SENSE_1_NEG: J11.1 J18.2 J19.2 U8.5 | length 54.6
  Top Layer w0.254: J18.2@31.644,20.644 27.5,16.5 ; U8.5 33.837,6.987 32.987,6.987 28,2 20,2 J11.1 22.5,16.5 27.5,16.5 ; J19.2@34.73,16.73 34.5,16.5 27.5,16.5
VOLT_SENSE_1_POS: J10.1 U8.4 | length 8.1
  Top Layer w0.254: J10.1 31.629,8 32.129,7.5 U8.4
VOLT_SENSE_2_NEG: J13.1 J19.1 J20.1 U8.7 | length 27.4
  Top Layer w0.254: J19.1 37.91,16.09 40.75,13.25 ; U8.7 39.871,7.5 40.371,8 J13.1 40.75,13.25 ; J20.1 40.75,13.25
VOLT_SENSE_2_POS: J12.1 U8.6 | length 24.4
  Top Layer w0.254: U8.6 38.745,7 43.745,2 52,2 J12.1
VOLT_SENSE_3_NEG: J15.1 J18.1 J21.2 U9.5 | length 39.2
  Top Layer w0.254: J15.1 20,29 28,29 ; J18.1 31.25,27.25 29.5,29 ; U9.5 33.837,33.987 32.987,33.987 28,29 ; J21.2 32,29 29.5,29 ; 28,29 29.5,29
VOLT_SENSE_3_POS: J14.1 U9.4 | length 8.1
  Top Layer w0.254: J14.1 31.629,35 32.129,34.5 U9.4
VOLT_SENSE_4_NEG: J17.1 J20.2 J21.1 U9.7 | length 29.5
  Top Layer w0.254: U9.7@37.479,34.509 37.188,34.218 37.188,33.786 37.191,33.783 37.191,33.573 37.188,33.569 37.965,32.792 37.965,32.465 ; U9.7@37.502,34.487 38.137,34.487 U9.7 39.871,34.5 40.371,35 J17.1 ; J20.2 40.75,29.68 37.965,32.465 ; J21.1@37.95,26.91 J21.1 J21.1@37.95,26.91 ; J21.1@37.95,26.91 37.95,32.45 37.965,32.465
VOLT_SENSE_4_POS: J16.1 U9.6 | length 24.4
  Top Layer w0.254: U9.6 38.745,34 43.745,29 52,29 J16.1
pads on no net: J5.4 J5.S1 J5.S2 J5.S3 J5.S4 J5.S5 J5.S6 SW1.3 U1.2 U1.3 U1.4 U1.5 U1.6 U1.8 U1.9 U1.10 U1.11 U1.14 U1.15 U1.20 U1.22 U1.23 U1.24 U1.25 U1.26 U1.27 U1.29 U1.30 U1.33 U1.34 U1.35 U1.36 U1.37 U1.38 U1.39 U1.40 U1.41 U1.42 U1.43 U1.44 U1.45 U1.50 U1.51 U1.52 U1.53 U1.54 U1.55 U1.56 U1.57 U1.58 U1.59 U7.2 U7.6 U8.2 U9.2

## Polygon pours and split planes (outlines as drawn)
3V3 on Top Layer "3V3_L01_P000" (solid, pour order 0): 0.5,0.5 119.5,0.5 119.5,79.5 0.5,79.5
CURR_SENSE_2_POS on Top Layer "CURR_SENSE_2_POS_L01_P006" (solid, remove dead copper, pour order 6): 52.25,65.75 52.25,60.25 52.25,56.75 54.5,56.75 58,60.25 63.75,60.25 63.75,71.75 58,71.75 52.25,71.75
CURR_SENSE_1_POS on Top Layer "CURR_SENSE_1_POS_L01_P004" (solid, remove dead copper, pour order 4): 20.25,65.75 20.25,60.25 20.25,56.75 22.5,56.75 26,60.25 31.75,60.25 31.75,71.75 26,71.75 20.25,71.75
CURR_SENSE_2_NEG on Top Layer "CURR_SENSE_2_NEG_L01_P005" (solid, remove dead copper, pour order 5): 40.25,65.75 40.25,60.25 46,60.25 49.5,56.75 51.75,56.75 51.75,60.25 51.75,71.75 46,71.75 40.25,71.75
CURR_SENSE_1_NEG on Top Layer "CURR_SENSE_1_NEG_L01_P003" (solid, remove dead copper, pour order 3): 8.25,65.75 8.25,60.25 14,60.25 17.5,56.75 19.75,56.75 19.75,60.25 19.75,71.75 14,71.75 8.25,71.75
GND on Bottom Layer "GND_L02_P001" (solid, pour order 1): 0.5,0.5 119.5,0.5 119.5,79.5 0.5,79.5

## Silkscreen, mask and mechanical layers (free items; w line width, h text height)
Top Overlay:
  lines w0.254: 8.5,2.5 31.5,2.5 31.5,13.5 8.5,13.5 8.5,2.5 ; 8.5,29.5 31.5,29.5 31.5,40.5 8.5,40.5 8.5,29.5 ; 8.5,60.5 31.5,60.5 31.5,71.5 8.5,71.5 8.5,60.5 ; 29.5,15 42.5,15 42.5,28 29.5,28 29.5,15 ; 40.5,2.5 63.5,2.5 63.5,13.5 40.5,13.5 40.5,2.5 ; 40.5,29.5 63.5,29.5 63.5,40.5 40.5,40.5 40.5,29.5 ; 40.5,60.5 63.5,60.5 63.5,71.5 40.5,71.5 40.5,60.5 ; 90.5,57.75 113,57.75 113,76 90.5,76 90.5,57.75 ; 94,14.5 112.25,14.5 112.25,20.75 94,20.75 94,14.5
  text "TARGET MCU" at 96.862,76 h1.5
  text "BOOT0" at 95,72.627 h1.5
  text "BOOT1" at 103.5,72.627 h1.5
  text "CURRENT SENSE 1" at 13.366,71.537 h1.5
  text "CURRENT SENSE 2" at 45.349,71.5 h1.5
  text "3V3" at 92.25,67.547 h1
  text "GND" at 99,67.543 h1
  text "GND" at 102,67.543 h1
  text "3V3" at 109,67.547 h1
  text "RX" at 94.1,58.547 h1
  text "TX" at 96.7,58.547 h1
  text "CLK" at 99.5,58.544 h1
  text "GND" at 102.4,58.543 h1
  text "DIO" at 105.4,58.543 h1
  text "3V3" at 108,58.543 h1
  text "RESET" at 72.453,57.75 h1.5
  text "3V3" at 96.25,53.627 h1.5
  text "VOLTAGE SENSE 3" at 13.349,27.754 h1.5
  text "VOLTAGE SENSE 4" at 45.349,27.754 h1.5
  text "3" at 30,25.5 h1.5
  text "4" at 40,25.5 h1.5
  text "SCL" at 71.328,19.254 h1.5
  text "SDA" at 75.236,19.254 h1.5
  text "GP0" at 95.524,18.6 h1
  text "GP1" at 99.825,18.6 h1
  text "GP2" at 104.024,18.6 h1
  text "GP3" at 108.271,18.6 h1
  text "1" at 30,15.5 h1.5
  text "2" at 40,15.5 h1.5
  text "DEBUG" at 85.294,14.5 h1.5
  text "VOLTAGE SENSE 1" at 13.366,13.537 h1.5
  text "VOLTAGE SENSE 2" at 45.349,13.5 h1.5
  text "USB BRIDGE" at 98.474,12.754 h1.5
  text "SHORT / GROUNDS" at 32.264,12.033 h1.5
  text "Scribe Rev 1.0 / ckalitin.github.io/scribe / Christopher Kalitin 2025" at 77,1.862 h1.5

## Text inside footprints (layer, text, board x,y; h text height)
J5: Mechanical 13 "PCB END" at 119.7,44.85 h0.75 r90